# Altium PCB VESC.PcbDoc (part 1 of 3)
Units mm, origin at the board's own origin, x right, y up, seen from the top; angles counter-clockwise.
Board outline 74.1 x 118 mm, 2 copper layers (Component Side, Bottom Layer), stack 1.571 mm thick; 186 components, 177 nets, 891 pads, 378 vias.
Unrouted connection lines stored in the file: 5.
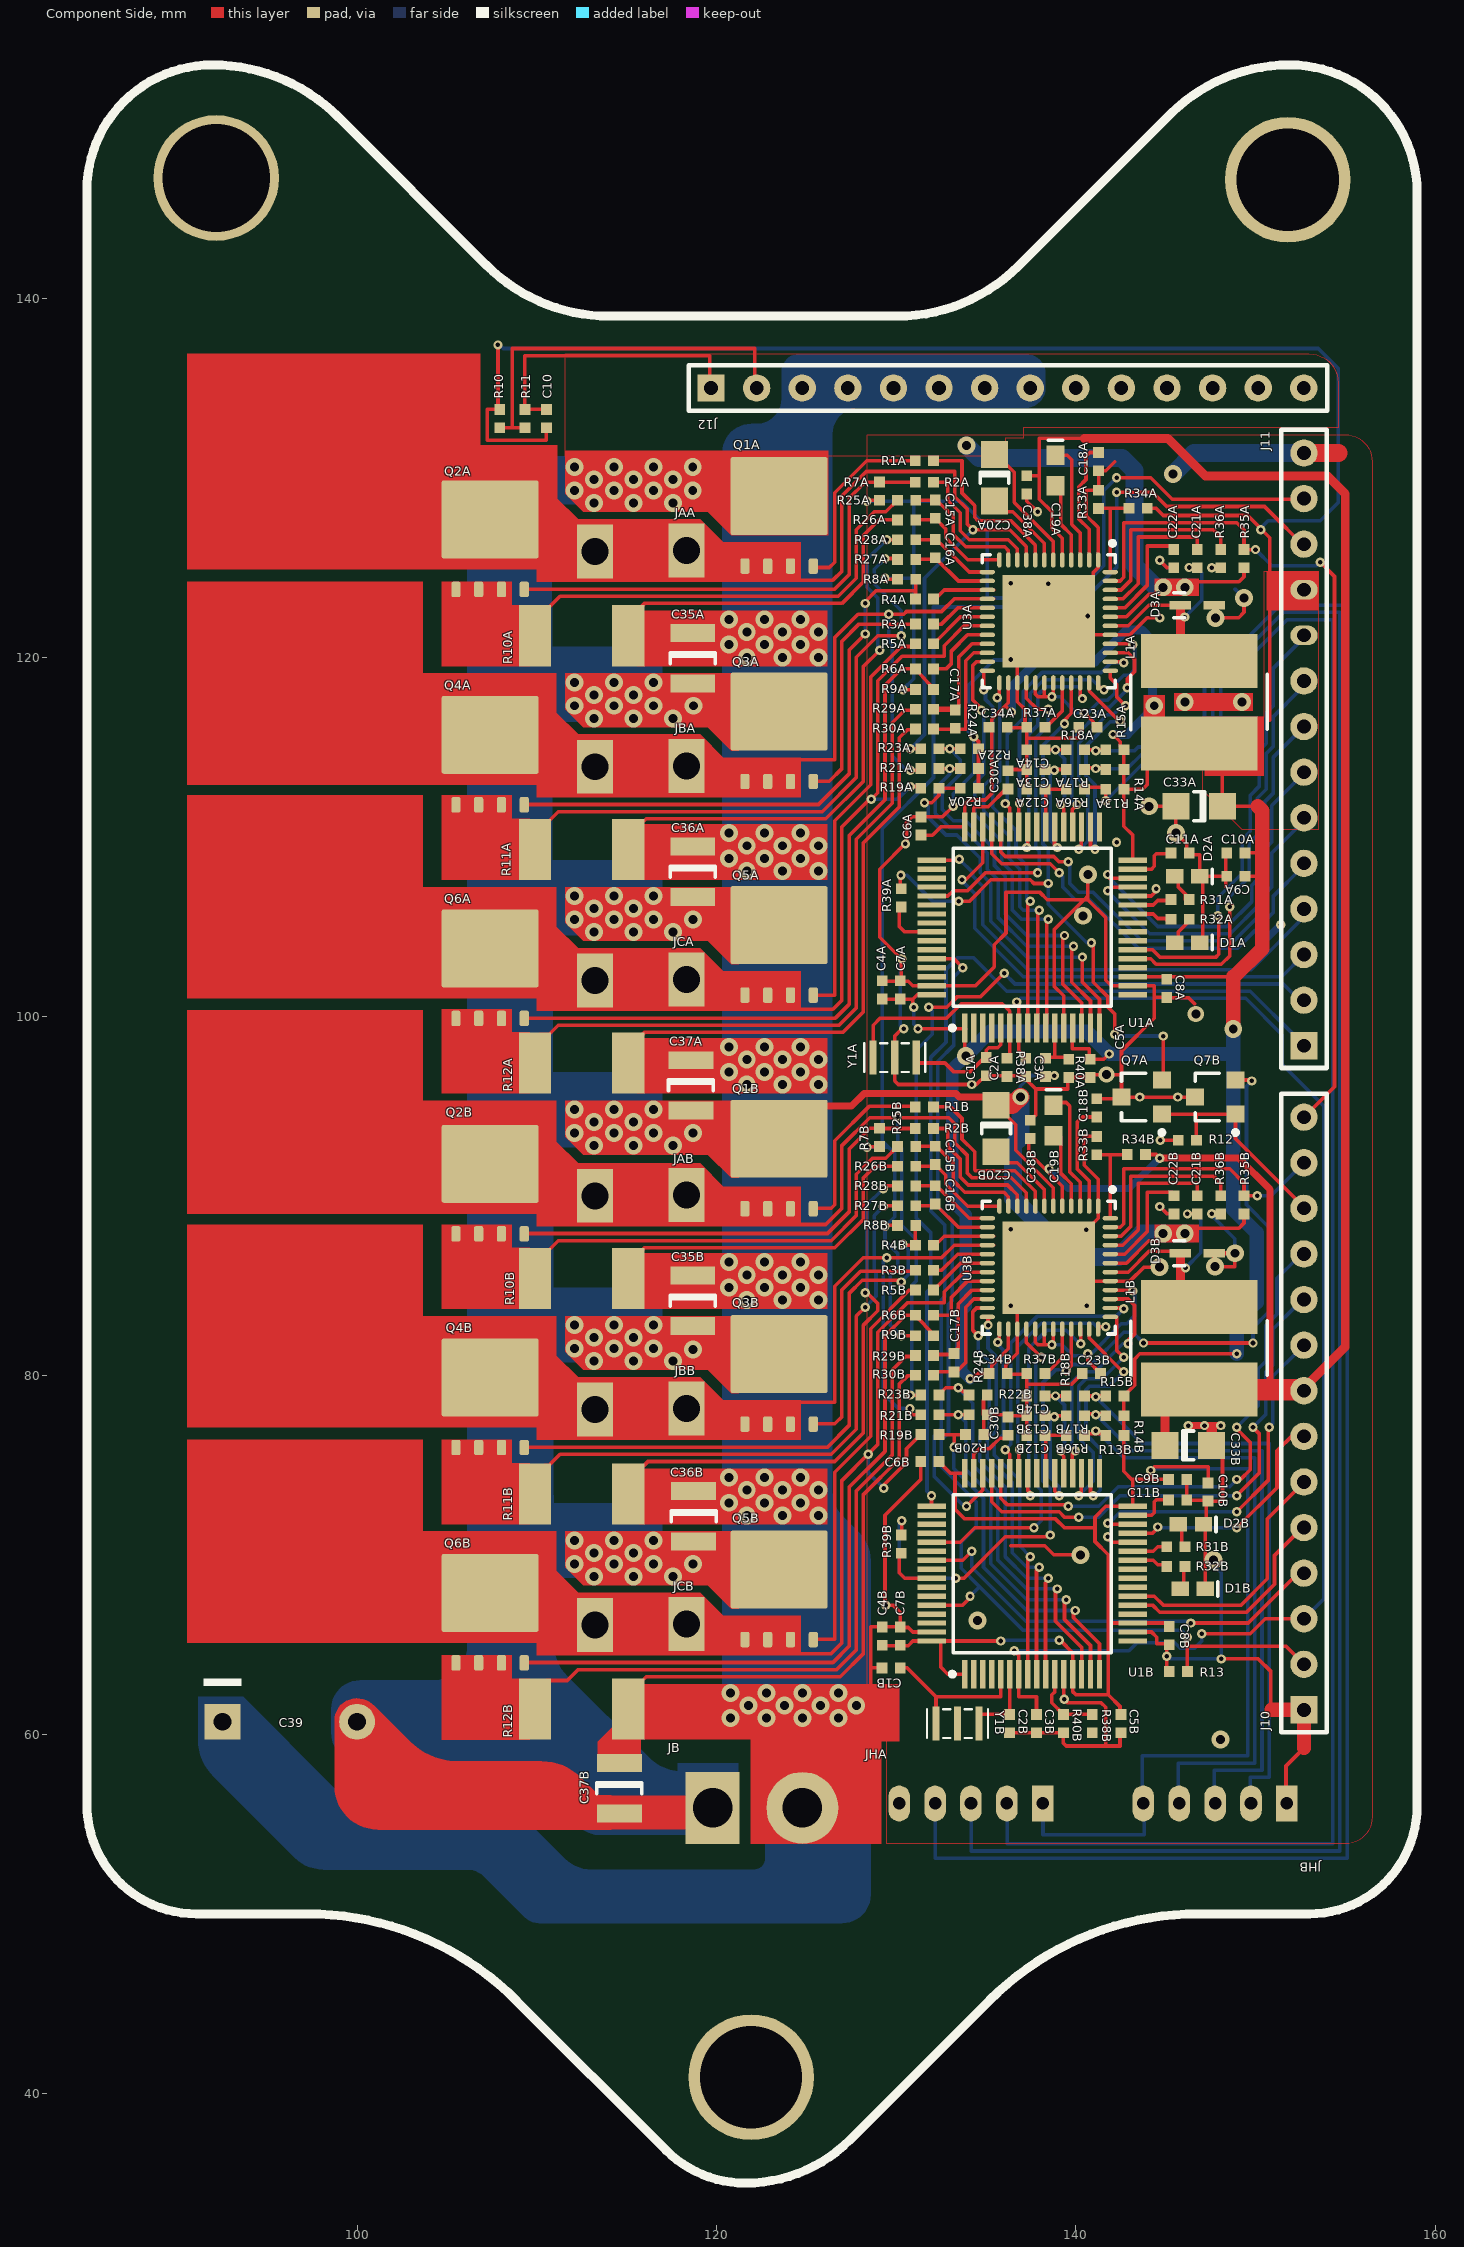
[diagram p0: Component Side view]
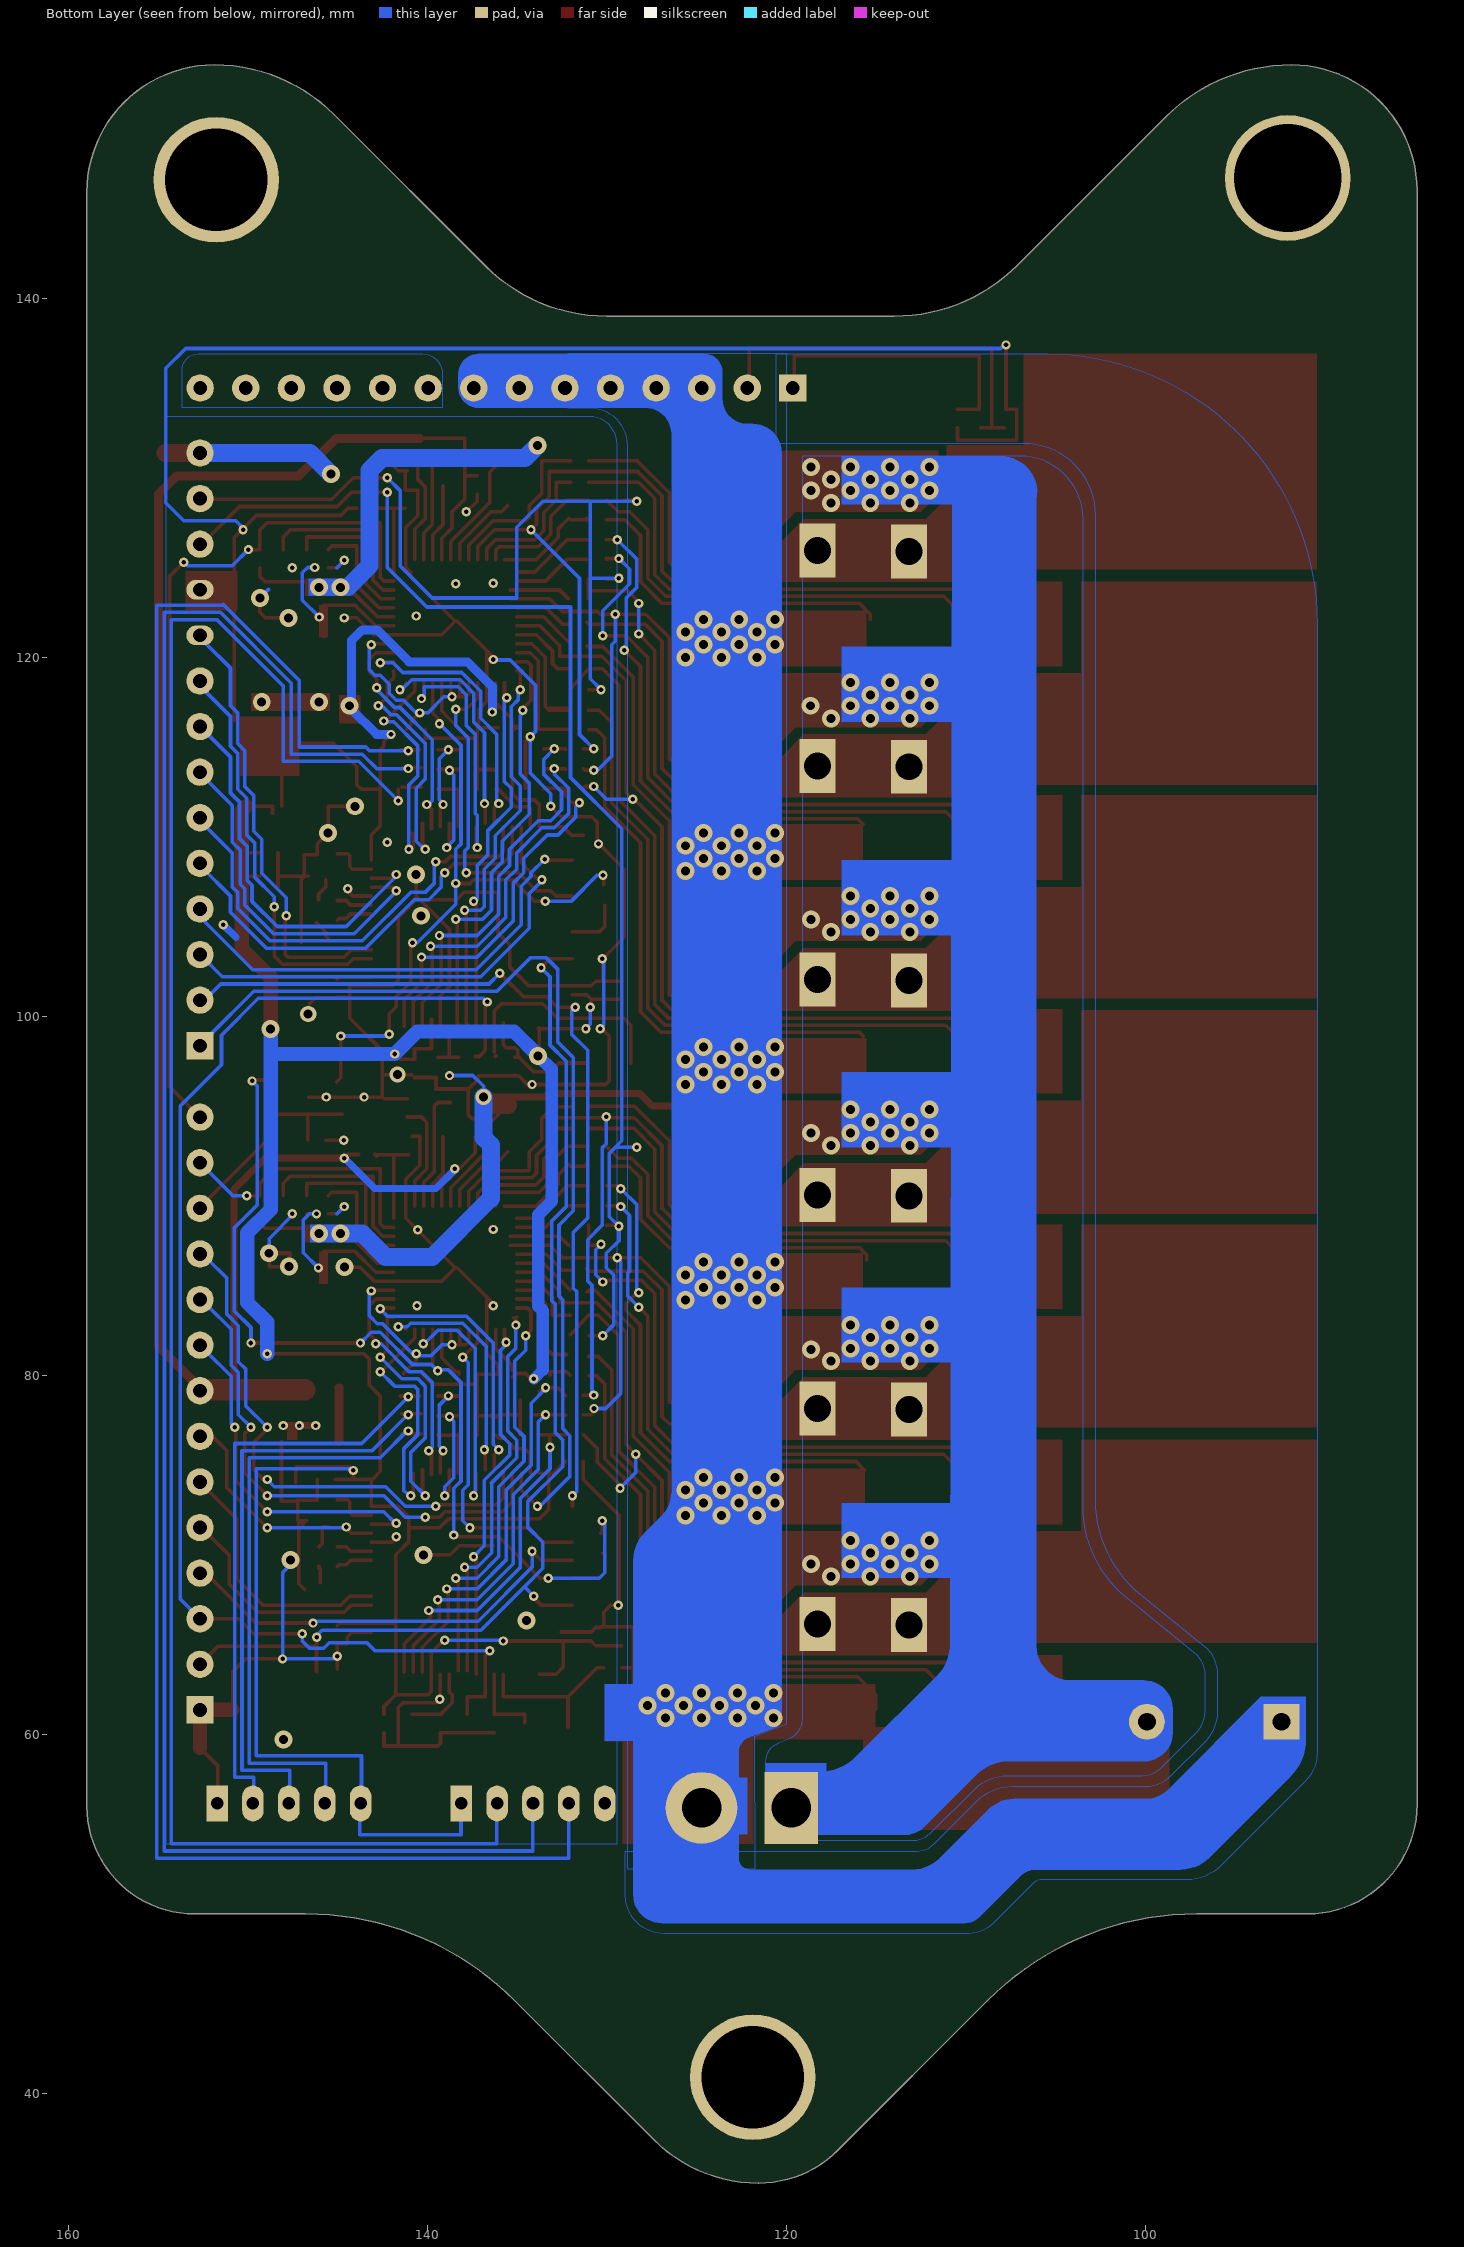
[diagram p1: Bottom Layer view, seen from below]

## Layer stack, top to bottom
Top Solder: solder mask 0.0102, Solder Resist, Dk 3.5
Component Side: signal copper 0.0356
Dielectric 1: core 1.5, FR-4, Dk 4.2
Bottom Layer: signal copper 0.0356
Solder Side: solder mask 0.0102, Solder Resist, Dk 3.5

## Board outline
159,56 159,145.9 ccw(c151.9,145.9) 151.9,153 ccw(c151.9,143.585) 145.242,150.242 136.809,141.809 cw(c130.027,148.591) 130.027,139 114.031,139 cw(c114.031,148.733) 107.149,141.851 98.899,150.101 ccw(c91.9,143.103) 91.9,153 ccw(c91.9,146) 84.9,146 84.9,56.1 ccw(c91,56.1) 91,50 97.172,50 cw(c97.172,33.516) 108.828,45.172 117.172,36.828 ccw(c121.586,41.243) 121.586,35 ccw(c121.586,43.243) 127.414,37.414 135.172,45.172 cw(c146.828,33.515) 146.828,50 153,50 ccw(c153,56)

## Design rules (kind name [scope] priority, off if disabled: settings)
Clearance Clearance_Poly [InPolygon And Not IsPad] p1: gap=0.3
Clearance [All] p2 off: gap=0.16
DiffPairsRouting [All] p1: maxlimit=0.305 minlimit=0.152 mostfreqgap=0.152 toplayer_minwidth=0.076 toplayer_maxwidth=0.305 toplayer_prefwidth=0.152 bottomlayer_minwidth=0.076 bottomlayer_maxwidth=0.305 bottomlayer_prefwidth=0.152 maxuncoupledlength=12.7
HoleSize [All] p1: absolutevalues=TRUE maxlimit=10 minlimit=0.025 maxpercent=80.000 minpercent=20.000
MatchedLengths USBC_ADAPTER_USB2 [InDifferentialPair('USBC_D')] p1: tolerance=1.5 checknetsindiffpair=FALSE checkdiffpairvsdiffpair=TRUE checkxsignals=TRUE checkothers=TRUE
MatchedLengths USBC_ADAPTER_DP [InNetClass('SMALL_SIGNAL_DP')] p2: tolerance=1.5 checknetsindiffpair=FALSE checkdiffpairvsdiffpair=TRUE checkxsignals=TRUE checkothers=TRUE
MatchedLengths USBC_ADAPTER_USB3 [InNetClass('SMALL_SIGNAL_USBC')] p3: tolerance=1.5 checknetsindiffpair=FALSE checkdiffpairvsdiffpair=TRUE checkxsignals=TRUE checkothers=TRUE
MatchedLengths FLEX_ADAPTER_MIPI_A [InNetClass('SMALL_SIGNAL_MIPI_A')] p4: tolerance=0.508 checknetsindiffpair=FALSE checkdiffpairvsdiffpair=TRUE checkxsignals=TRUE checkothers=TRUE
MatchedLengths FLEX_ADAPTER_MIPI_B [InNetClass('SMALL_SIGNAL_MIPI_B')] p5: tolerance=0.508 checknetsindiffpair=FALSE checkdiffpairvsdiffpair=TRUE checkxsignals=TRUE checkothers=TRUE
MatchedLengths FLEX_ADAPTER_MIPI_C [InNetClass('SMALL_SIGNAL_MIPI_C')] p6: tolerance=0.508 checknetsindiffpair=FALSE checkdiffpairvsdiffpair=TRUE checkxsignals=TRUE checkothers=TRUE
MatchedLengths DISPLAY_BOARD_USB2_AUD [InNetClass('SMALL_SIGNAL_USB2_AUD')] p7: tolerance=1.27 checknetsindiffpair=FALSE checkdiffpairvsdiffpair=TRUE checkxsignals=TRUE checkothers=TRUE
MatchedLengths DISPLAY_BOARD_USB2_MCU [InNetClass('SMALL_SIGNAL_USB2_MCU')] p8: tolerance=1.27 checknetsindiffpair=FALSE checkdiffpairvsdiffpair=TRUE checkxsignals=TRUE checkothers=TRUE
MatchedLengths DISPLAY_BOARD_USB2_PORT1 [InNetClass('SMALL_SIGNAL_USB2_PORT1')] p9: tolerance=1.27 checknetsindiffpair=FALSE checkdiffpairvsdiffpair=TRUE checkxsignals=TRUE checkothers=TRUE
MatchedLengths DISPLAY_BOARD_USB2_PORT2 [InNetClass('SMALL_SIGNAL_USB2_PORT2')] p10: tolerance=1.27 checknetsindiffpair=FALSE checkdiffpairvsdiffpair=TRUE checkxsignals=TRUE checkothers=TRUE
MatchedLengths DISPLAY_BOARD_MIPI_11 [InNetClass('SMALL_SIGNAL_MIPI11')] p11: tolerance=1.27 checknetsindiffpair=FALSE checkdiffpairvsdiffpair=TRUE checkxsignals=TRUE checkothers=TRUE
MatchedLengths DISPLAY_BOARD_MIPI_00 [InNetClass('SMALL_SIGNAL_MIPI00')] p12: tolerance=1.27 checknetsindiffpair=FALSE checkdiffpairvsdiffpair=TRUE checkxsignals=TRUE checkothers=TRUE
MatchedLengths DISPLAY_BOARD_MIPI_01 [InNetClass('SMALL_SIGNAL_MIPI01')] p13: tolerance=1.27 checknetsindiffpair=FALSE checkdiffpairvsdiffpair=TRUE checkxsignals=TRUE checkothers=TRUE
MatchedLengths DISPLAY_BOARD_MIPI_10 [InNetClass('SMALL_SIGNAL_MIPI10')] p14: tolerance=1.27 checknetsindiffpair=FALSE checkdiffpairvsdiffpair=TRUE checkxsignals=TRUE checkothers=TRUE
MatchedLengths DISPLAY_BOARD_USB2_UP [InNetClass('SMALL_SIGNAL_USB2_UP')] p15: tolerance=1.27 checknetsindiffpair=FALSE checkdiffpairvsdiffpair=TRUE checkxsignals=TRUE checkothers=TRUE
MinimumSolderMaskSliver [All] p1: minsoldermaskwidth=0.051
NetAntennae [All] p1 off: netantennaetolerance=0
PolygonConnect [Not IsVia vs Not IsVia] p1: connectstyle=Relief reliefconductorwidth=0.2 reliefentries=4 polygonreliefangle="90 Angle" airgapwidth=0.3
PolygonConnect PolygonConnect_Via [IsVia vs IsVia] p2: connectstyle=Direct reliefconductorwidth=0.254 reliefentries=4 polygonreliefangle="90 Angle" airgapwidth=0.152
RoutingCorners [All] p1: cornerstyle=Round minsetback=2.54 maxsetback=2.54
RoutingVias [All] p1: holewidth=0.152 width=0.279 viastyle="Through Hole" minholewidth=0.152 minwidth=0.279 maxholewidth=0.305 maxwidth=0.61
ShortCircuit [Not IsPad vs Not IsPad] p1: allowed=TRUE
SilkToSilkClearance [All] p1 off: silktosilkclearance=0.102
SilkToSolderMaskClearance [IsPad] p1 off: minsilkscreentomaskgap=0.102 clearancetoexposedcopper=TRUE
SolderMaskExpansion [All] p1: expansion=0.051
Width [All] p1: maxlimit=2.54 minlimit=0.076 preferedwidth=0.152
22 further rules are at their usual default settings.

## Components (designator, comment, footprint, x,y, rotation, side; value= is the part's Value field where it differs from the comment)
C1A "GCM1555C1H180JA16D" "CAP 0402" 135,97.2 r270 top
C1B "GCM1555C1H180JA16D" "CAP 0402" 129.7,63.7 r180 top (schematic designator C1A)
C2A "GCM1555C1H180JA16D" "CAP 0402" 136.15,97.15 r270 top
C2B "GCM1555C1H180JA16D" "CAP 0402" 136.3,60.6 r270 top (schematic designator C2A)
C3A "GCM155R71E103JA37D" "CAP 0402" 137.2,97.15 r270 top
C3B "GCM155R71E103JA37D" "CAP 0402" 137.8,60.6 r270 top (schematic designator C3A)
C4A "GRM155C81C225ME15D" "CAP 0402" 129.21,101.466 r90 top
C4B "GRM155C81C225ME15D" "CAP 0402" 129.21,65.466 r90 top (schematic designator C4A)
C5A "GRM155C81C225ME15D" "CAP 0402" 140.8,97.1 r270 top
C5B "GRM155C81C225ME15D" "CAP 0402" 142.5,60.6 r270 top (schematic designator C5A)
C6A "GRM155C81C225ME15D" "CAP 0402" 131.36,110.6 r90 top
C6B "GRM155C81C225ME15D" "CAP 0402" 131.86,75.2 r180 top (schematic designator C6A)
C7A "GRM155C81C225ME15D" "CAP 0402" 130.21,101.466 r90 top
C7B "GRM155C81C225ME15D" "CAP 0402" 130.21,65.466 r90 top (schematic designator C7A)
C8A "GRM155C81C225ME15D" "CAP 0402" 145.06,101.55 r270 top
C8B "GRM155C81C225ME15D" "CAP 0402" 145.2,65.5 r270 top (schematic designator C8A)
C9A "GRM155C81C225ME15D" "CAP 0402" 148.9,107.8 r180 top
C9B "GRM155C81C225ME15D" "CAP 0402" 145.66,74.2 r0 top (schematic designator C9A)
C10 "GCM155R71E103JA37D" "CAP 0402" 110.5,133.3 r270 top
C10A "GRM155C81C225ME15D" "CAP 0402" 148.9,109.1 r180 top
C10B "GRM155C81C225ME15D" "CAP 0402" 147.36,73.5 r270 top (schematic designator C10A)
C11A "GRM155C81C225ME15D" "CAP 0402" 145.8,109.1 r0 top
C11B "GRM155C81C225ME15D" "CAP 0402" 145.66,73.05 r0 top (schematic designator C11A)
C12A "GCM155R72A222KA37D" "CAP 0402" 137.76,112.65 r0 top
C12B "GCM155R72A222KA37D" "CAP 0402" 137.76,76.65 r0 top (schematic designator C12A)
C13A "GCM155R72A222KA37D" "CAP 0402" 137.76,113.75 r0 top
C13B "GCM155R72A222KA37D" "CAP 0402" 137.76,77.75 r0 top (schematic designator C13A)
C14A "GCM155R72A222KA37D" "CAP 0402" 137.76,114.85 r0 top
C14B "GCM155R72A222KA37D" "CAP 0402" 137.76,78.85 r0 top (schematic designator C14A)
C15A "GCM155R72A222KA37D" "CAP 0402" 132.16,128.25 r90 top
C15B "GCM155R72A222KA37D" "CAP 0402" 132.16,92.25 r90 top (schematic designator C15A)
C16A "GCM155R72A222KA37D" "CAP 0402" 132.16,126.05 r270 top
C16B "GCM155R72A222KA37D" "CAP 0402" 132.16,90.05 r270 top (schematic designator C16A)
C17A "GCM155R72A222KA37D" "CAP 0402" 133.268,116.55 r90 top
C17B "GCM155R72A222KA37D" "CAP 0402" 133.2,80.7 r90 top (schematic designator C17A)
C18A "GRM155C81C225ME15D" "CAP 0402" 141.26,130.9 r270 top
C18B "GRM155C81C225ME15D" "CAP 0402" 141.16,94.9 r90 top (schematic designator C18A)
C19A "C0603C473K1RECAUTO" "CAP 0603" 138.86,130.4 r270 top
C19B "C0603C473K1RECAUTO" "CAP 0603" 138.75,94.2 r270 top (schematic designator C19A)
C20A "GRJ31CR72A105KE11L" "CAP 1206" 135.46,130 r270 top
C20B "GRJ31CR72A105KE11L" "CAP 1206" 135.552,93.75 r270 top (schematic designator C20A)
C21A "GCM155R71E103JA37D" "CAP 0402" 146.76,125.492 r270 top
C21B "GCM155R71E103JA37D" "CAP 0402" 146.76,89.5 r270 top
C22A "GRM155C81C225ME15D" "CAP 0402" 145.45,125.5 r90 top
C22B "GRM155C81C225ME15D" "CAP 0402" 145.46,89.5 r90 top (schematic designator C22A)
C23A "GRM155C81C225ME15D" "CAP 0402" 140.66,116.1 r0 top
C23B "GRM155C81C225ME15D" "CAP 0402" 140.86,80.1 r0 top (schematic designator C23A)
C30A "GRM155C81C225ME15D" "CAP 0402" 136.21,113.166 r90 top
C30B "GRM155C81C225ME15D" "CAP 0402" 136.21,77.166 r90 top (schematic designator C30A)
C33A "TMK316AB7106KL-T" "CAP 1206" 146.86,111.7 r180 top
C33B "TMK316AB7106KL-T" "CAP 1206" 146.26,76.1 r0 top
C34A "GRM155C81C225ME15D" "CAP 0402" 135.66,116.1 r0 top
C34B "GRM155C81C225ME15D" "CAP 0402" 135.66,80.1 r0 top (schematic designator C34A)
C35A "CGA6M3X7S2A475M200AB" "CAP 1210" 118.65,119.95 r270 top
C35B "CGA6M3X7S2A475M200AB" "CAP 1210" 118.65,84.15 r270 top
C36A "CGA6M3X7S2A475M200AB" "CAP 1210" 118.65,108.05 r270 top
C36B "CGA6M3X7S2A475M200AB" "CAP 1210" 118.7,72.15 r270 top
C37A "CGA6M3X7S2A475M200AB" "CAP 1210" 118.55,96.15 r270 top
C37B "CGA6M3X7S2A475M200AB" "CAP 1210" 114.56,57 r270 top
C38A "GRM155C81C225ME15D" "CAP 0402" 137.26,129.6 r270 top
C38B "GRM155C81C225ME15D" "CAP 0402" 137.45,93.7 r90 top
C39 "108CKS100MRY" "CAP 7.5mm Bent Reverse" 96.2,60.7 r0 top
D1A "LTST-C190KRKT" "LED 0603" 146.2,104.1 r0 top
D1B "LTST-C190KRKT" "LED 0603" 146.5,68.1 r0 top (schematic designator D1A)
D2A "LTST-C190KRKT" "LED 0603" 146.2,107.8 r0 top
D2B "LTST-C190KRKT" "LED 0603" 146.4,71.7 r0 top (schematic designator D2A)
D3A "NSR02100HT1G" SOD-323/SC76 146.76,122.9 r180 top
D3B "NSR02100HT1G" SOD-323/SC76 146.76,86.8 r180 top
J10 "HEADER_14P1" HEADER_14P1_FEMALE_TH#1 152.7,77.9 r90 top
J11 "HEADER_14P1" HEADER_14P1_FEMALE_TH#2 152.7,114.9 r90 top
J12 "HEADER_14P1" HEADER_14P1_FEMALE_TH#1 136.21,135 r0 top
JAA "63849-1" 63849-1 115.76,125.9 r0 top
JAB "63849-1" 63849-1 115.76,90 r0 top (schematic designator JAA)
JB "XT30_S" "XT30 SOCKET" 122.26,55.6 r180 top
JBA "63849-1" 63849-1 115.76,113.9 r0 top
JBB "63849-1" 63849-1 115.76,78.1 r0 top (schematic designator JBA)
JCA "63849-1" 63849-1 115.76,102 r0 top
JCB "63849-1" 63849-1 115.76,66.1 r0 top (schematic designator JCA)
JHA "B05B-PASK" B05B-PASK 134.15,56.15 r180 top
JHB "B05B-PASK" B05B-PASK 147.75,56.15 r180 top
L1A "SDE0805A-331K" SDE0805A 146.86,117.5 r270 top
L1B "SDE0805A-331K" SDE0805A 146.86,81.5 r270 top
Q1A "CSD19531Q5A" VSONP-8 123.46,127.9 r90 top
Q1B "CSD19531Q5A" VSONP-8 123.46,92.1 r90 top (schematic designator Q1A)
Q2A "CSD19531Q5A" VSONP-8 107.36,126.6 r90 top
Q2B "CSD19531Q5A" VSONP-8 107.36,90.7 r90 top (schematic designator Q2A)
Q3A "CSD19531Q5A" VSONP-8 123.46,115.9 r90 top
Q3B "CSD19531Q5A" VSONP-8 123.46,80.1 r90 top (schematic designator Q3A)
Q4A "CSD19531Q5A" VSONP-8 107.36,114.6 r90 top
Q4B "CSD19531Q5A" VSONP-8 107.36,78.8 r90 top (schematic designator Q4A)
Q5A "CSD19531Q5A" VSONP-8 123.46,104 r90 top
Q5B "CSD19531Q5A" VSONP-8 123.46,68.1 r90 top (schematic designator Q5A)
Q6A "CSD19531Q5A" VSONP-8 107.36,102.7 r90 top
Q6B "CSD19531Q5A" VSONP-8 107.36,66.8 r90 top (schematic designator Q6A)
Q7A "NX7002AKVL" SOT-23-3 143.66,95.5 r90 top
Q7B "NX7002AKVL" SOT-23-3 147.76,95.5 r90 top
R1A "ERJ-PA3J4R7V" "RES 0402" 131.552,130.95 r180 top
R1B "ERJ-PA3J4R7V" "RES 0402" 131.552,94.95 r180 top (schematic designator R1A)
R2A "ERJ-PA3J4R7V" "RES 0402" 131.552,129.75 r180 top
R2B "ERJ-PA3J4R7V" "RES 0402" 131.552,93.75 r180 top (schematic designator R2A)
R3A "ERJ-PA3J4R7V" "RES 0402" 131.56,121.85 r180 top
R3B "ERJ-PA3J4R7V" "RES 0402" 131.56,85.85 r180 top (schematic designator R3A)
R4A "ERJ-PA3J4R7V" "RES 0402" 131.56,123.25 r180 top
R4B "ERJ-PA3J4R7V" "RES 0402" 131.56,87.25 r180 top (schematic designator R4A)
R5A "ERJ-PA3J4R7V" "RES 0402" 131.56,120.75 r180 top
R5B "ERJ-PA3J4R7V" "RES 0402" 131.56,84.75 r180 top (schematic designator R5A)
R6A "ERJ-PA3J4R7V" "RES 0402" 131.56,119.35 r180 top
R6B "ERJ-PA3J4R7V" "RES 0402" 131.56,83.35 r180 top (schematic designator R6A)
R7A "ERJ-2RKF3902X" "RES 0402" 129.052,129.25 r90 top
R7B "ERJ-2RKF3902X" "RES 0402" 129.052,93.25 r90 top (schematic designator R7A)
R8A "ERJ-2RKF3902X" "RES 0402" 130.56,124.35 r0 top
R8B "ERJ-2RKF3902X" "RES 0402" 130.56,88.35 r0 top (schematic designator R8A)
R9A "ERJ-2RKF3902X" "RES 0402" 131.56,118.2 r0 top
R9B "ERJ-2RKF3902X" "RES 0402" 131.56,82.2 r0 top (schematic designator R9A)
R10 "ERT-J0EG202GM" "RES 0402" 107.9,133.3 r90 top
R10A "WSLF2512L5000FEA" "RES 2512" 112.46,121.2 r180 top
R10B "WSLF2512L5000FEA" "RES 2512" 112.46,85.4 r180 top (schematic designator R10A)
R11 "ERJ-2RKF2201X" "RES 0402" 109.3,133.3 r270 top
R11A "WSLF2512L5000FEA" "RES 2512" 112.46,109.3 r180 top
R11B "WSLF2512L5000FEA" "RES 2512" 112.46,73.4 r180 top (schematic designator R11A)
R12 "ERJ-2RKF2201X" "RES 0402" 146.2,93.1 r0 top
R12A "WSLF2512L5000FEA" "RES 2512" 112.46,97.4 r180 top
R12B "WSLF2512L5000FEA" "RES 2512" 112.46,61.4 r180 top (schematic designator R12A)
R13 "ERJ-2RKF1002X" "RES 0402" 145.7,63.5 r0 top
R13A "ERJ-2RKF2201X" "RES 0402" 142.16,112.65 r0 top
R13B "ERJ-2RKF2201X" "RES 0402" 142.16,76.65 r0 top (schematic designator R13A)
R14A "ERJ-2RKF2201X" "RES 0402" 142.16,113.75 r0 top
R14B "ERJ-2RKF2201X" "RES 0402" 142.16,77.75 r0 top (schematic designator R14A)
R15A "ERJ-2RKF2201X" "RES 0402" 142.16,114.85 r0 top
R15B "ERJ-2RKF2201X" "RES 0402" 142.16,78.85 r0 top (schematic designator R15A)
R16A "ERJ-2RKF1002X" "RES 0402" 139.96,112.65 r180 top
R16B "ERJ-2RKF1002X" "RES 0402" 139.96,76.65 r180 top (schematic designator R16A)
R17A "ERJ-2RKF1002X" "RES 0402" 139.96,113.75 r180 top
R17B "ERJ-2RKF1002X" "RES 0402" 139.96,77.75 r180 top (schematic designator R17A)
R18A "ERJ-2RKF1002X" "RES 0402" 139.96,114.85 r180 top
R18B "ERJ-2RKF1002X" "RES 0402" 139.96,78.85 r180 top (schematic designator R18A)
R19A "ERJ-2RKF3902X" "RES 0402" 131.86,112.7 r180 top
R19B "ERJ-2RKF3902X" "RES 0402" 131.86,76.7 r180 top (schematic designator R19A)
R20A "ERJ-2RKF2201X" "RES 0402" 134.06,112.7 r180 top
R20B "ERJ-2RKF2201X" "RES 0402" 134.35,76.7 r180 top (schematic designator R20A)
R21A "ERJ-2RKF3902X" "RES 0402" 131.86,113.8 r180 top
R21B "ERJ-2RKF3902X" "RES 0402" 131.86,77.8 r180 top (schematic designator R21A)
R22A "ERJ-2RKF2201X" "RES 0402" 134.06,113.8 r180 top
R22B "ERJ-2RKF2201X" "RES 0402" 134.55,77.8 r180 top (schematic designator R22A)
R23A "ERJ-2RKF3902X" "RES 0402" 131.86,114.9 r180 top
R23B "ERJ-2RKF3902X" "RES 0402" 131.86,78.9 r180 top (schematic designator R23A)
R24A "ERJ-2RKF2201X" "RES 0402" 134.06,114.9 r180 top
R24B "ERJ-2RKF2201X" "RES 0402" 134.55,78.9 r180 top (schematic designator R24A)
R25A "ERJ-2RKF1000X" "RES 0402" 130.56,128.75 r180 top
R25B "ERJ-2RKF1000X" "RES 0402" 130.56,92.75 r180 top (schematic designator R25A)
R26A "ERJ-2RKF1000X" "RES 0402" 130.56,127.65 r180 top
R26B "ERJ-2RKF1000X" "RES 0402" 130.56,91.65 r180 top (schematic designator R26A)
R27A "ERJ-2RKF1000X" "RES 0402" 130.56,125.45 r180 top
R27B "ERJ-2RKF1000X" "RES 0402" 130.56,89.45 r180 top (schematic designator R27A)
R28A "ERJ-2RKF1000X" "RES 0402" 130.56,126.55 r180 top
R28B "ERJ-2RKF1000X" "RES 0402" 130.56,90.55 r180 top (schematic designator R28A)
R29A "ERJ-2RKF1000X" "RES 0402" 131.56,117.1 r180 top
R29B "ERJ-2RKF1000X" "RES 0402" 131.56,81.1 r180 top (schematic designator R29A)
R30A "ERJ-2RKF1000X" "RES 0402" 131.56,116 r180 top
R30B "ERJ-2RKF1000X" "RES 0402" 131.56,80 r180 top (schematic designator R30A)
R31A "ERJ-2RKF1000X" "RES 0402" 145.8,106.5 r180 top
R31B "ERJ-2RKF1000X" "RES 0402" 145.56,70.45 r180 top (schematic designator R31A)
R32A "ERJ-2RKF1000X" "RES 0402" 145.8,105.4 r180 top
R32B "ERJ-2RKF1000X" "RES 0402" 145.56,69.35 r180 top (schematic designator R32A)
R33A "ERJ-2RKF3162X" "RES 0402" 141.26,128.8 r270 top
R33B "ERJ-2RKF2611X" "RES 0402" 141.16,92.8 r270 top
R34A "ERJ-2RKF1002X" "RES 0402" 143.46,128.3 r0 top
R34B "ERJ-2RKF1002X" "RES 0402" 143.36,92.3 r0 top
R35A "ERJ-2RKF2743X" "RES 0402" 149.36,125.492 r270 top
R35B "ERJ-2RKF2743X" "RES 0402" 149.36,89.5 r270 top
R36A "ERJ-2RKF1333X" "RES 0402" 148.06,125.492 r270 top
R36B "ERJ-2RKF1003X" "RES 0402" 148.06,89.5 r270 top
R37A "ERJ-2RKF4702X" "RES 0402" 137.76,116.1 r180 top
R37B "ERJ-2RKF4702X" "RES 0402" 137.76,80.1 r180 top (schematic designator R37A)
R38A "ERJ-2RKF3902X" "RES 0402" 138.3,97.15 r270 top
R38B "ERJ-2RKF3902X" "RES 0402" 140.9,60.6 r270 top
R39A "ERJ-2RKF2201X" "RES 0402" 130.26,106.6 r270 top
R39B "ERJ-2RKF2201X" "RES 0402" 130.26,70.6 r270 top
R40A "ERJ-2RKF2201X" "RES 0402" 139.6,97.1 r90 top
R40B "ERJ-2RKF2201X" "RES 0402" 139.3,60.6 r90 top
U1A "STM32F405RGT6" "QFP-64 - P0.5MM" 137.56,104.95 r90 top
U1B "STM32F405RGT6" "QFP-64 - P0.5MM" 137.56,68.95 r90 top (schematic designator U1A)
U3A "DRV8353RH" "QFN-48 - P0.5MM" 138.485,122 r270 top
U3B "DRV8353RH" "QFN-48 - P0.5MM" 138.485,86 r270 top (schematic designator U3A)
Y1A "CSTNE8M00G550000R0" "MuRata CSTN" 129.9,97.7 r0 top
Y1B "CSTNE8M00G550000R0" "MuRata CSTN" 133.4,60.6 r180 top

## Footprints (in the part's own frame and the unit in brackets; to place one, negate y for a bottom-side part, rotate by r counter-clockwise, add the part's x,y. Pads: shape width x height; smd on the part's side, far side on the other; paste and mask are expansions set on the pad)
63849-1 [mm] "SPADE CONNECTOR PCB MOUNT"
  rect 2x3 hole 1.5: 1(-2.55,0) 1(2.55,0.05)
  body extent -3.96,-1.54 3.96,1.54, height 10.3
B05B-PASK [mm] "JST 5 PIN PA CONNECTOR LOCKING"
  rect 1.2x2 hole 0.7: 1(-4,0)
  oval 1.2x2 hole 0.7: 2(-2,0) 3(0,0) 4(2,0) 5(4,0)
  body extent -6,-2.2 6,3.1, height 7.85
"CAP 7.5mm Bent Reverse" [mm] "Electrolytic Capacitor, 7.5mm Lead Spacing, 0.6mm Holes"
  rect 2x2 hole 1: 1(-3.75,0)
  round 2 hole 1: 2(3.75,0)
  silkscreen extent -4.8,2 -2.7,2.4, body extent -8,-0.61 8,45, height 18
"CAP 0402" [mm] "Chip Capacitor; Body 1.0 x 0.5 mm (LxW typ)"
  rect 0.6x0.6 smd: 1(-0.508,0) 2(0.508,0)
  body extent -0.5,-0.3 0.5,0.3, height 0.2
"CAP 0603" [mm] "Chip Capacitor; Body 1.6 x 0.8 mm (LxW typ)"
  rect 1.1x1 smd: 1(-0.85,0) 2(0.85,0)
  silkscreen extent -1.7,-0.4 -1.7,0.4, body extent -1.14,-0.51 1.14,0.51, height 1
"CAP 1206" [mm] "Chip Capacitor; Body 3.2 x 1.6 mm (LxW typ)"
  rect 1.5x1.5 smd: 1(-1.295,0) 2(1.295,0)
  silkscreen extent -0.3,-0.8 0.3,0.8, body extent -1.6,-0.8 1.6,0.8, height 1
"CAP 1210" [mm] "Chip Capacitor; Body 3.2 x 2.5 mm (LxW typ)"
  rect 1x2.5 smd: 1(-1.4,0) 2(1.4,0)
  silkscreen extent -0.3,-1.25 0.3,1.25, body extent -1.6,-1.25 1.6,1.25, height 0.92
HEADER_14P1_FEMALE_TH#1 [mil] "Through Hole Header 14 Pin 1 Row 2.54mm"
  rect 60x60 hole 30: 1(-651.18,0)
  round 60 hole 30: 2(-551.18,0) 3(-451.18,0) 4(-351.18,0) 5(-251.18,0) 6(-151.18,0) 7(-51.18,0) 8(48.82,0) 9(148.82,0) 10(248.82,0) 11(348.82,0) 12(448.82,0) 13(548.82,0) 14(648.82,0)
  silkscreen extent -700,-50 700,50, body extent -700,-50 700,50, height 335
HEADER_14P1_FEMALE_TH#2 [mil] "Through Hole Header 14 Pin 1 Row 2.54mm"
  rect 60x60 hole 30: 1(-651.18,0)
  round 60 hole 30: 2(-551.18,0) 3(-451.18,0) 4(-351.18,0) 5(-251.18,0) 6(-151.18,0) 7(-51.18,0) 8(48.82,0) 9(148.82,0) 12(448.82,0) 13(548.82,0) 14(648.82,0)
  oval 43.31x60 hole 30: 10(248.82,0) 11(348.82,0)
  silkscreen extent -700,-50 700,50, body extent -700,-50 700,50, height 335
"LED 0603" [mm] "Chip Diode; Body 1.6 x 0.8 mm (LxW typ)"
  rect 0.965x0.8 smd: 1(-0.7,0) 2(0.7,0)
  silkscreen extent 1.4,-0.4 1.4,0.4, body extent -0.8,-0.4 0.8,0.4, height 0.35
"MuRata CSTN" [mm] "Crystal Package 4-SMD 3.2x2.5mm"
  rect 0.4x1.9 smd: 1(-1.2,0) 2(0,0) 3(1.2,0)
  silkscreen extent -1.7,-0.8 1.7,0.8, body extent -1.6,-0.65 1.6,0.65, height 0.7
"QFN-48 - P0.5MM" [mm] "QFN; 48 Leads; Body 7 x 7 mm; Pitch 0.5 mm"
  rect 5.15x5.15 smd: 0(0,0)
  oval 0.85x0.25 smd: 1(-3.425,2.75) 2(-3.425,2.25) 3(-3.425,1.75) 4(-3.425,1.25) 5(-3.425,0.75) 6(-3.425,0.25) 7(-3.425,-0.25) 8(-3.425,-0.75) 9(-3.425,-1.25) 10(-3.425,-1.75) 11(-3.425,-2.25) 12(-3.425,-2.75) 25(3.425,-2.75) 26(3.425,-2.25) 27(3.425,-1.75) 28(3.425,-1.25) 29(3.425,-0.75) 30(3.425,-0.25) 31(3.425,0.25) 32(3.425,0.75) 33(3.425,1.25) 34(3.425,1.75) 35(3.425,2.25) 36(3.425,2.75)
  oval 0.25x0.85 smd: 13(-2.75,-3.425) 14(-2.25,-3.425) 15(-1.75,-3.425) 16(-1.25,-3.425) 17(-0.75,-3.425) 18(-0.25,-3.425) 19(0.25,-3.425) 20(0.75,-3.425) 21(1.25,-3.425) 22(1.75,-3.425) 23(2.25,-3.425) 24(2.75,-3.425) 37(2.75,3.425) 38(2.25,3.425) 39(1.75,3.425) 40(1.25,3.425) 41(0.75,3.425) 42(0.25,3.425) 43(-0.25,3.425) 44(-0.75,3.425) 45(-1.25,3.425) 46(-1.75,3.425) 47(-2.25,3.425) 48(-2.75,3.425)
  silkscreen extent -4.47,-3.7 3.7,3.7, body extent -3.51,-3.51 3.51,3.51, height 0.8
"QFP-64 - P0.5MM" [mm] "64-Pin Plastic Quad Flat Pack (TQFP)"
  rect 1.6x0.3 smd: 1(-5.6,3.75) 2(-5.6,3.25) 3(-5.6,2.75) 4(-5.6,2.25) 5(-5.6,1.75) 6(-5.6,1.25) 7(-5.6,0.75) 8(-5.6,0.25) 9(-5.6,-0.25) 10(-5.6,-0.75) 11(-5.6,-1.25) 12(-5.6,-1.75) 13(-5.6,-2.25) 14(-5.6,-2.75) 15(-5.6,-3.25) 16(-5.6,-3.75) 33(5.6,-3.75) 34(5.6,-3.25) 35(5.6,-2.75) 36(5.6,-2.25) 37(5.6,-1.75) 38(5.6,-1.25) 39(5.6,-0.75) 40(5.6,-0.25) 41(5.6,0.25) 42(5.6,0.75) 43(5.6,1.25) 44(5.6,1.75) 45(5.6,2.25) 46(5.6,2.75) 47(5.6,3.25) 48(5.6,3.75)
  rect 0.3x1.6 smd: 17(-3.75,-5.6) 18(-3.25,-5.6) 19(-2.75,-5.6) 20(-2.25,-5.6) 21(-1.75,-5.6) 22(-1.25,-5.6) 23(-0.75,-5.6) 24(-0.25,-5.6) 25(0.25,-5.6) 26(0.75,-5.6) 27(1.25,-5.6) 28(1.75,-5.6) 29(2.25,-5.6) 30(2.75,-5.6) 31(3.25,-5.6) 32(3.75,-5.6) 49(3.75,5.6) 50(3.25,5.6) 51(2.75,5.6) 52(2.25,5.6) 53(1.75,5.6) 54(1.25,5.6) 55(0.75,5.6) 56(0.25,5.6) 57(-0.25,5.6) 58(-0.75,5.6) 59(-1.25,5.6) 60(-1.75,5.6) 61(-2.25,5.6) 62(-2.75,5.6) 63(-3.25,5.6) 64(-3.75,5.6)
  silkscreen extent -5.72,-4.4 4.4,4.57, body extent -6.01,-6.01 6.01,6.01, height 1.55
"RES 0402" [mm] "Body 1.0 x 0.5 mm (LxW typ)"
  rect 0.6x0.6 smd: 1(-0.508,0) 2(0.508,0)
  body extent -0.5,-0.25 0.5,0.25, height 0.35
"RES 2512" [mm] "VISHAY SHUNT RESISTOR"
  rect 1.8x3.4 smd: 1(-2.6,0) 2(2.6,0)
  body extent -3.17,-1.57 3.17,1.6, height 1.22
SDE0805A [mm]
  rect 3x6.5 smd: 1(-2.3,0) 2(2.3,0)
  silkscreen extent -1.55,-3.8 1.55,3.8, body extent -3.89,-3.5 3.89,3.5, height 5
SOD-323/SC76 [mm]
  rect 1.2x0.45 smd: 1(-0.95,0) 2(0.95,0)
  silkscreen extent 0.7,-0.7 1.3,0.7, body extent -1.43,-0.76 1.43,0.74, height 1.08
SOT-23-3 [mm] "SOT-23; 3 Leads; Body 3.0 x 2.5 mm, inc. leads (LxW max)"
  rect 0.95x1 smd: 1(-0.95,-1.125) 2(0.95,-1.125) 3(0,1.125)
  silkscreen extent -2.1,-1.25 1.32,1.13, body extent -1.5,-1.27 1.5,1.28, height 1
VSONP-8 [mm] "SON, 8-Leads, Body 5x6mm"
  rrect39% 0.86x0.51 smd paste-0.05 mask-0.05: 1(-2.82,1.905) 2(-2.82,0.635) 3(-2.82,-0.635) 4(-2.82,-1.905) 5(2.82,-1.905) 6(2.82,-0.635) 7(2.82,0.635) 8(2.82,1.905)
  rrect40% 0.25x0.555 on Top Solder: 9(-0.83,2.372) 9(-0.83,-2.372)
  rrect40% 0.25x0.555 on Top Paste: 9(-0.83,2.372) 9(-0.83,-2.372)
  rrect11% 0.95x1.13 on Top Paste: 9(-0.535,1.33) 9(-0.535,0) 9(-0.535,-1.33) 9(0.615,1.33) 9(0.615,0) 9(0.615,-1.33) 9(1.765,-1.33) 9(1.765,0) 9(1.765,1.33)
  rrect3% 3.58x4 on Top Solder: 9(0.75,0)
  rrect5% 4.34x5.4 smd paste-3 mask-3: 9(1.08,0)
  body extent -3.05,-2.55 3.05,2.55, height 1.06
"XT30 SOCKET" [mm] "XT30 SOCKET"
  round 4 hole 2.2: 1(-2.5,-0.3)
  rect 3x4 hole 2.2: 2(2.5,-0.3)
  body extent -5.18,-2.9 5.28,2.35, height 12.5

## Part data
C1A C1B C2A C2B: "CAP 0402 18pF 50V (NP0 Dielectric)"
C3A C3B C10 C21A C21B: "CAP 0402 10nF 25V"
C4A C4B C5A C5B C6A C6B C7A C7B C8A C8B C9A C9B C10A C10B C11A C11B C18A C18B C22A C22B C23A C23B C30A C30B C34A C34B C38A C38B: "CAP 0402 2.2uF 16V"
C12A C12B C13A C13B C14A C14B C15A C15B C16A C16B C17A C17B: "CAP 0402 2.2nF 100V (X7R DIELECTRIC)"
C19A C19B: "CAP 0603 47nF 100V (X7R DIELECTRIC)"
C20A C20B: "CAP 1206 1uF 100V"
C33A C33B: "CAP 1206 10uF 25V"
C35A C35B C36A C36B C37A C37B: "CAP 1206 4.7uF 100V"
C39: "CAP 7.5mm Radial 1000uF 100V"
D1A D1B D2A D2B: "RED LED"
D3A D3B: "Schottky Diodes & Rectifiers 100V"
J10 J11 J12: "2.54mm Header 14 Pin 1 Row"
JAA JAB JBA JBB JCA JCB: "SPADE CONNECTOR BOARD MOUNT"
JB: "XT30 SOCKET"
L1A L1B: "Fixed Inductors 330uH 10% SMD 0805 AEC-Q200"
Q1A Q1B Q2A Q2B Q3A Q3B Q4A Q4B Q5A Q5B Q6A Q6B: "100V 100A VSONP-8 5.3mOhm Pwr MOSFET"
Q7A Q7B: "MOSFET 60V 190mA"
R1A R1B R2A R2B R3A R3B R4A R4B R5A R5B R6A R6B: "RES 0402 4.7R 5%"
R7A R7B R8A R8B R9A R9B R19A R19B R21A R21B R23A R23B R38A R38B: "RES 0402 39k 1%"
R10: "NTC THERMISTOR 0402 2k 2%"
R10A R10B R11A R11B R12A R12B: "RES 2512 0.5mOhm 1%"
R11 R12 R13A R13B R14A R14B R15A R15B R20A R20B R22A R22B R24A R24B R39A R39B R40A R40B: "RES 0402 2.2k 1%"
R13 R16A R16B R17A R17B R18A R18B R34A R34B: "RES 0402 10k 1%"
R25A R25B R26A R26B R27A R27B R28A R28B R29A R29B R30A R30B R31A R31B R32A R32B: "RES 0402 100R 1%"
R33A: "RES 0402 31.6k 1%"
R33B: "RES 0402 2.61k 1%"
R35A R35B: "RES 0402 274k 1%"
R36A: "RES 0402 133k 1%"
R36B: "RES 0402 100k 1%"
R37A R37B: "RES 0402 47k 1%"
U1A U1B: "Cortex M4 MCU"
U3A U3B: "100V Three Phase Gate Driver With 3 Current Shunt Amplifiers and Buck Regulator"
Y1A Y1B: "Ceramic Resonator 8.0000MHz 33pf 0.5%"

## Free pads (board coordinates)
  round 7 hole 6: 2(92.1,146.7)
  round 7 hole 5.7: 2(121.9,40.9) 2(151.8,146.6)

## Via types
v1: diameter 0.52, hole 0.254, Component Side to Bottom Layer, tented both sides, 205 vias
v2: diameter 1, hole 0.5, Component Side to Bottom Layer, tented both sides, 170 vias
v3: diameter 0.9, hole 0.5, Component Side to Bottom Layer, tented both sides, 3 vias

## Nets (pads, with @x,y where several pads share a name; then routed paths per layer and width w, separated by ;. In a path a pad name is that pad's centre, name@x,y a point inside that pad or via, vN(x,y) a via of type N, cw(c..) or ccw(c..) an arc to the next point about the centre after c; other vN are vias at no path point)
BOOT0: J10.2 R13.2 U1A.60 U1B.60 | length 65.2
  Component Side w0.2: U1B.60@131.96,67.2 133.7,67.2 v1@134.2,67.7 ; U1A.60@131.96,103.2 133.2,103.2 v1(133.7,102.7) ; v1(146.2,65.4) v1@146.208,65.392 ; R13.2@146.208,63.5 v1@146.208,65.392 ; J10.2@152.7,63.9 151.7,64.9 146.208,64.9 v1@146.208,65.392
  Bottom Layer w0.2: v1(133.7,102.7) 133.2,102.2 133.2,98.4 132.3,97.5 132.3,89.4 133.1,88.6 133.1,84.15 132.9,83.95 132.9,76.8 132.5,76.4 132.5,74.9 134.45,72.95 134.45,71.55 133.6,70.7 133.6,69.25 134.625,68.225 ; v1@146.3,65.4 145.9,65.8 137.05,65.8 134.625,68.225 ; 134.625,68.225 v1(134.1,67.7) 134.625,68.225
DISABLE_GATES: J10.12 Q7A.1 Q7B.1 R12.2 | length 12.3
  Component Side w0.2: Q7A.1@144.785,94.55 Q7B.1@148.885,94.55 148.885,93.175 J10.12@152.66,89.4 ; R12.2@146.708,93.1 146.708,94.542
GND: C1A.2 C1B.2 C2A.2 C2B.2 C3A.2 C3B.2 C4A.2 C4B.2 C5A.2 C5B.2 C6A.2 C6B.2 C7A.2 C7B.2 C8A.2 C8B.2 C9A.2 C9B.2 C10.1 C10A.2 C10B.2 C11A.2 C11B.2 C12A.1 C12B.1 C13A.1 C13B.1 C14A.1 C14B.1 C18A.2 C18B.2 C22A.1 C22B.1 C23A.1 C23B.1 C30A.2 C30B.2 C33A.2 C33B.2 C34A.2 C34B.2 C38A.2 C38B.2 C39.1 D1A.2 D1B.2 D2A.2 D2B.2 D3A.1 D3B.1 J10.1 J11.14 J12.1 J12.3 J12.4 J12.5 J12.6 J12.7 J12.8 JB.1 JHA.1 JHB.1 Q7A.3 Q7B.3 R11.1 R12.1 R13.1 R20A.1 R20B.1 R22A.1 R22B.1 R24A.1 R24B.1 R33A.1 R33B.1 R36A.2 R36B.2 R37A.2 R37B.2 R40A.1 R40B.1 U1A.12 U1A.18 U1A.28 U1A.63 U1B.12 U1B.18 U1B.28 U1B.63 U3A.0 U3A.1 U3A.27 U3A.41 U3B.0 U3B.1 U3B.27 U3B.41 Y1A.2 Y1B.2 | length 304.3
  Component Side w0.2: C10.1@110.5,133.808 R11.1@109.3,133.808 109.3,136.8 119.6,136.8 J12.1@119.6,134.8 ; 128.56,62.6 128.56,63.7 ; C1B.2@129.192,63.7 128.56,63.7 ; C4A.2@129.21,101.958 130.06,101.958 130.068,101.95 130.66,101.95 130.91,101.7 U1A.63@131.96,101.7 134.4,101.7 135.45,102.75 135.45,103.99 136.1,104.64 136.1,106.9 138,106.9 138.4,106.5 140.66,106.5 ; C7A.2@130.26,102 130.26,103.2 129.06,104.4 129.06,108.2 130.56,109.7 130.56,110.8 130.868,111.108 C6A.2@131.36,111.108 132.568,111.108 v1(133.16,111.7) ; v1(130.4,99.3) 130.3,99.3 129.9,98.9 129.9,96.4 130.1,96.2 v1(134.2,96.2) 134.45,96.2 134.942,96.692 137.2,96.692 137.2,96.5 137.75,95.95 ; C7B.2@130.41,65.95 130.66,65.95 130.91,65.7 U1B.63@131.96,65.7 U1B.63@132.56,65.7 ; C7B.2@130.41,66 C7B.2@130.21,66 ; C6B.2@131.352,75.2 131.352,74.192 129.36,72.2 129.36,67.2 129.81,67.2 130.21,66.8 C7B.2@130.21,66 ; v1(134.31,115.566) 134.568,115.308 R24A.1@134.568,114.9 R22A.1@134.568,113.8 R20A.1@134.568,112.7 ; R24B.1@134.85,78.618 134.85,77.8 C30B.2@136.084,77.8 ; R20B.1@134.868,76.7 R22B.1@134.868,77.8 ; C34B.2@136.076,80.066 136.076,80.566 136.735,81.225 U3B.27@136.735,82.575 U3B.0@136.735,84.25 ; C34A.2@136.076,116.066 137.244,116.066 137.16,115.982 137.16,117.1 136.735,117.525 U3A.27@136.735,118.575 U3A.0@136.735,120.25 ; C30B.2@136.21,77.674 136.286,77.75 C13B.1@137.252,77.75 ; C30A.2@136.21,113.674 136.286,113.75 C13A.1@137.252,113.75 ; C34B.2@136.218,80.066 136.218,80.05 R37B.2@137.26,80.05 ; U3B.0@136.297,83.937 138.36,86 U3B.0@138.485,86 ; U3A.0@136.297,119.937 138.36,122 U3A.0@138.485,122 ; C2B.2@136.3,60.092 C3B.2@137.8,60.092 R40B.1@139.3,60.092 139.3,59.5 139.45,59.35 142.45,59.35 C5B.2@142.45,60.092 ; 136.36,70.5 138.26,70.5 138.76,70 v2(140.26,70) ; C12B.1@137.252,76.65 C13B.1@137.252,77.75 ; C12A.1@137.252,112.65 C13A.1@137.252,113.75 ; 137.252,115.5 140.152,115.5 C23A.1@140.152,116 ; R37B.2@137.26,79.95 137.252,79.942 137.252,79.5 ; R37A.2@137.26,115.95 137.252,115.942 C14A.1@137.252,114.85 C13A.1@137.252,113.75 ; C38A.2@137.26,129.092 137.26,128.7 v1(137.86,128.1) ; C38B.2@137.36,94.308 137.558,94.308 137.75,94.5 137.75,95.95 ; U1B.12@139.31,63.35 139.31,62.11 139.35,62.07 v1(139.35,61.95) ; U1A.12@139.31,99.35 139.31,101.14 138.8,101.65 138.8,104.85 140.375,106.425 ; v1@139.5,62 139.45,61.95 v1(139.35,61.95) ; C23B.1@140.352,80.1 139.752,79.5 137.252,79.5 ; 140.46,106.5 140.66,106.7 ; v2@140.46,107.7 140.66,107.5 140.66,106.7 ; C5A.2@140.75,96.592 139.55,96.592 139.55,95.95 137.75,95.95 ; R33B.1@140.86,93.308 140.46,93.308 140.46,91.7 141.235,90.925 U3B.1@141.235,89.425 141.235,88.75 U3B.0@138.485,86 ; C5A.2@140.892,96.742 142.535,96.742 ; C18B.2@141.16,95.408 Q7A.3@142.443,95.408 ; C18A.2@141.16,130.392 141.26,130.292 R33A.1@141.26,129.308 140.568,129.308 140.568,127.892 141.235,127.225 U3A.1@141.235,125.425 141.235,125 140.96,124.725 140.96,124.475 U3A.0@138.485,122 ; C18A.2@141.26,130.392 141.652,130.392 142.16,130.9 ; 141.65,59.35 141.65,61.5 141.4,61.75 139.55,61.75 v1(139.35,61.95) ; v1@141.7,71 142,70.7 U1B.28@143.16,70.7 ; U1B.18@143.16,65.7 144.21,65.7 144.5,65.41 144.5,65.05 145.052,65.05 145.06,65.042 v1@145.06,64.3 ; U1A.28@143.16,106.7 144.2,106.7 144.5,107 v1@144.5,107.1 ; v2(144.06,111.7) C33A.2@145.565,111.7 145.565,110.205 146.168,109.601 146.168,109 146.9,109 D2A.2@146.9,107.8 ; 144.46,101.05 145.052,101.05 C8A.2@145.06,101.042 146.258,101.042 146.6,100.7 ; v2@144.487,86.027 143.787,86.027 143.01,85.25 U3B.41@141.91,85.25 139.235,85.25 U3B.0@138.485,86 ; v1(144.66,89.4) 145.068,88.992 C22B.1@145.56,88.992 ; v1@144.66,122.2 143.96,122.2 143.01,121.25 U3A.41@141.91,121.25 139.235,121.25 U3A.0@138.485,122 ; v1(144.66,125.4) 145.068,124.992 C22A.1@145.56,124.992 ; v1(144.7,93.1) R12.1@145.692,93.1 ; R13.1@145.06,63.632 v1(145.06,64.35) ; C9B.2@146.168,74.2 C11B.2@146.168,73.05 C10B.2@147.302,73.05 ; v1(146.26,77.2) v1(147.16,77.2) v1(148.06,77.2) ; Q7B.3@146.635,95.5 Q7A.3@142.535,95.5 142.535,98.067 144.36,99.892 144.36,101.7 U1A.18@143.16,101.7 141.96,101.7 141.66,102 141.66,105.5 140.66,106.5 ; D2A.2@146.66,107.8 C9A.2@148.352,107.8 ; D2B.2@146.76,71.9 147.26,71.9 C10B.2@147.26,73.05 ; D1B.2@146.86,68.05 147.2,68.39 147.2,71.94 D2B.2@146.96,71.7 ; D2A.2@146.86,107.8 147.06,107.6 D1A.2@147.06,104.1 ; D2B.2@146.91,71.75 D2B.2@146.91,71.9 ; C10B.2@147.36,72.992 148.16,72.992 C33B.2@148.16,76.3 ; v2(147.75,86.05) 148.85,86.05 v2(148.85,86.8) ; v2(147.76,122.2) 149.06,122.2 149.36,122.5 v2(149.36,123.3) ; v1(148.1,64.2) 150.16,64.2 150.86,63.5 150.86,61.41 ; 148.352,107.208 C9A.2@148.352,107.8 ; C10A.2@148.352,109.1 C9A.2@148.352,107.8 ; JHB.1@151.7,55.3 151.7,58.24 152.7,59.24 ; 128.56,63.7 128.56,66 C7B.2@130.21,66 ; C13B.1@137.252,77.75 C14B.1@137.252,78.85 137.252,79.5 ; 140.66,106.5 140.66,106.7
  Component Side w0.25: v2@147.71,86.09 D3B.1@147.71,86.8 v2(148.85,86.8)
  Component Side w0.8: 150.91,61.36 J10.1@152.7,61.36 152.7,59.24
  Component Side w1: J11.14@152.7,131.38 154.63,131.38
  Bottom Layer w0.2: JB.1@124.76,55.7 JB.1@125.26,56.2 ; v1(130.3,103.2) 130.2,103.1 130.2,99.5 v1(130.4,99.3) ; v1(133.16,111.7) 133.16,112.4 134.31,113.55 v1(134.31,115.566) 134.01,115.866 134.01,118.45 135.41,119.85 136.335,119.85 v1(136.36,119.875) ; v1@136.335,83.85 v1(136.36,83.875) ; v1(144.66,89.4) 145.068,88.992 ; v1(144.66,125.4) 145.068,124.992 ; v1(145.06,64.35) 145.21,64.2 v1(148.1,64.2) 148.1,69.01 v2@147.56,69.55 ; v1(147.56,88.992) 147.468,88.992 148.85,87.61 v2(148.85,86.8) ; 148.86,123.8 v2(149.36,123.3)
  Bottom Layer w0.4: 150.7,104.4 v1(151.4,105.1)
  Bottom Layer w1: v2(145.4,130.2) 146.58,131.38 J11.14@152.7,131.38
  other v1: 129.4,67.2 141.76,71 140.61,83.875 136.36,88.125 140.56,88.1 143.56,95.5 145.66,95.5 144.46,107.1 130.5,109.6 142.26,109.7 144.66,122.192 140.66,122.3 138.46,124.1 136.36,124.125 147.56,124.992
  other v2: 148.06,59.7 134.51,66.35 147.66,69.7 144.66,86.027 140.4,105.6 140.66,107.9 145.56,110.2 146.06,117.5 149.26,117.5
  other v3: 141.7,96.75 146.673,100.127
JTDO: J10.4 | length 23.9
  Component Side w0.2: 131.96,69.7 133.7,69.7 v1(134.2,70.2) ; v1(146.4,66.2) 149.6,66.2 152.2,68.8 J10.4@152.4,68.8
  Bottom Layer w0.2: v1(134.2,70.2) 134.2,69.3 137.2,66.3 146.3,66.3 v1(146.4,66.2)
MA_ADC_TEMP: U1A.17
MA_AN_IN: R38A.1 R40A.2 U1A.11 | length 2.8
  Component Side w0.2: R38A.1@138.3,97.708 R40A.2@139.45,97.708 ; 138.81,97.718 U1A.11@138.81,99.35
MA_CAN_RX: U1A.61
MA_CAN_TX: U1A.62